# Altium PCB Big Coil Bridge PCBA_2.PcbDoc
Units mm, origin at the board's own origin, x right, y up, seen from the top; angles counter-clockwise.
Board outline 134 x 286 mm, 2 copper layers (Top Layer, Bottom Layer); 22 components, 6 nets, 674 pads, 192 vias.
Unrouted connection lines stored in the file: 1.
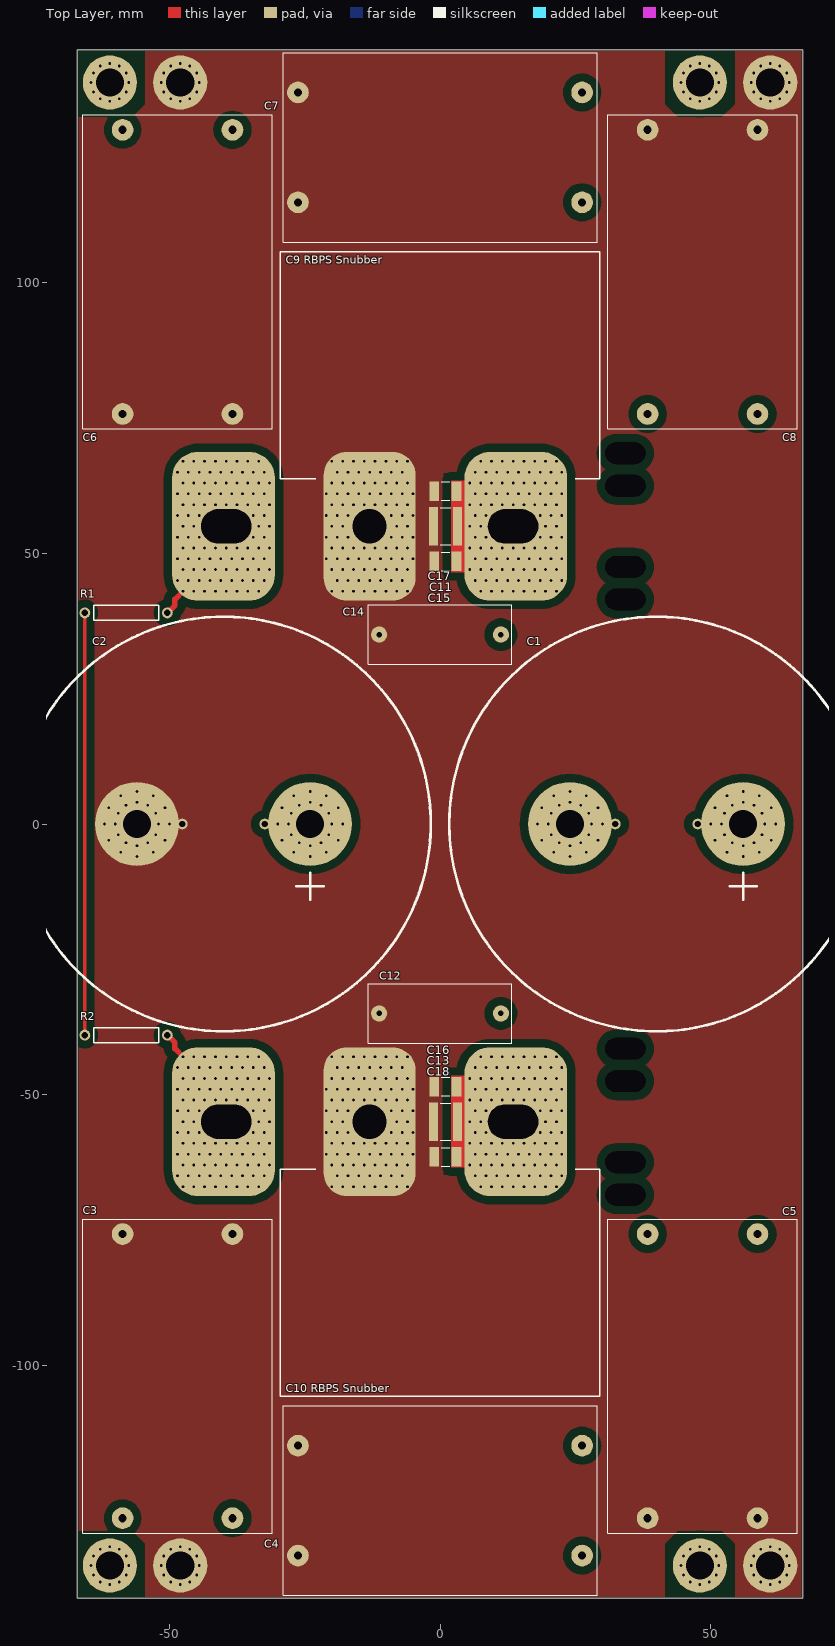
[diagram p0: Top Layer view]
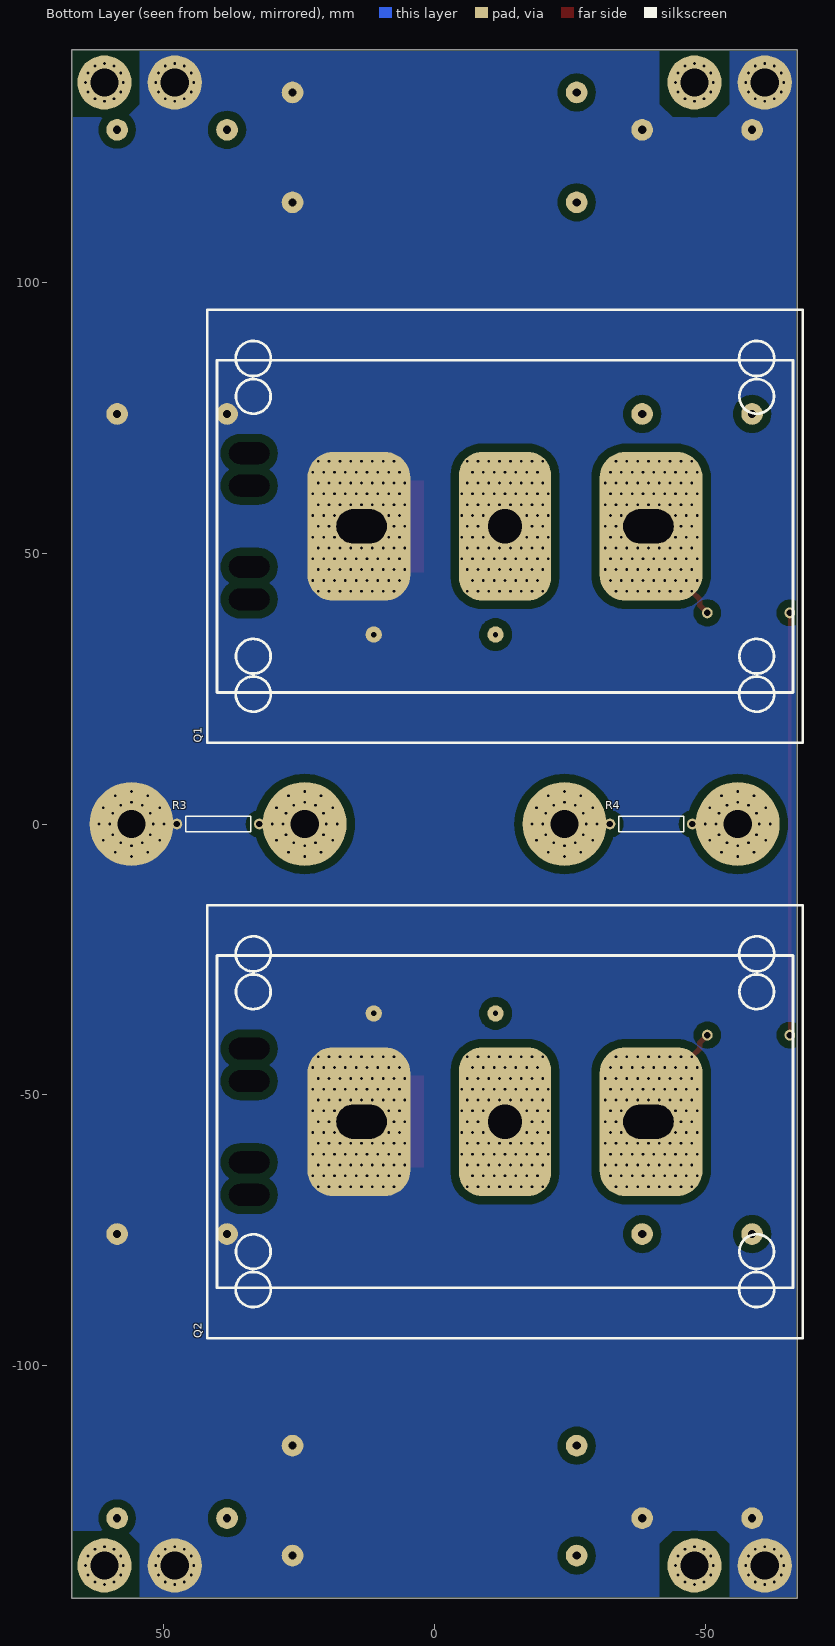
[diagram p1: Bottom Layer view, seen from below]
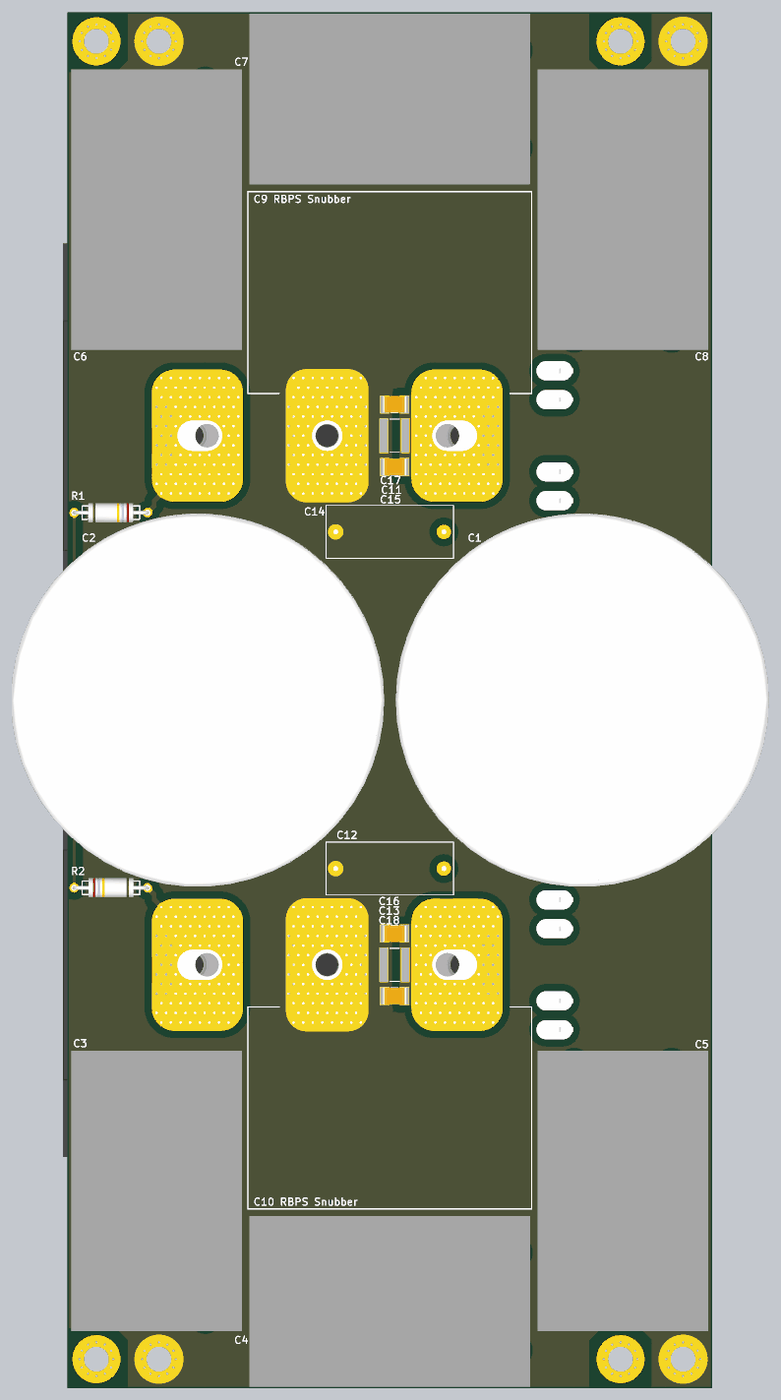
[diagram p2: 3D render of the assembled board from above, using the file's embedded part models]
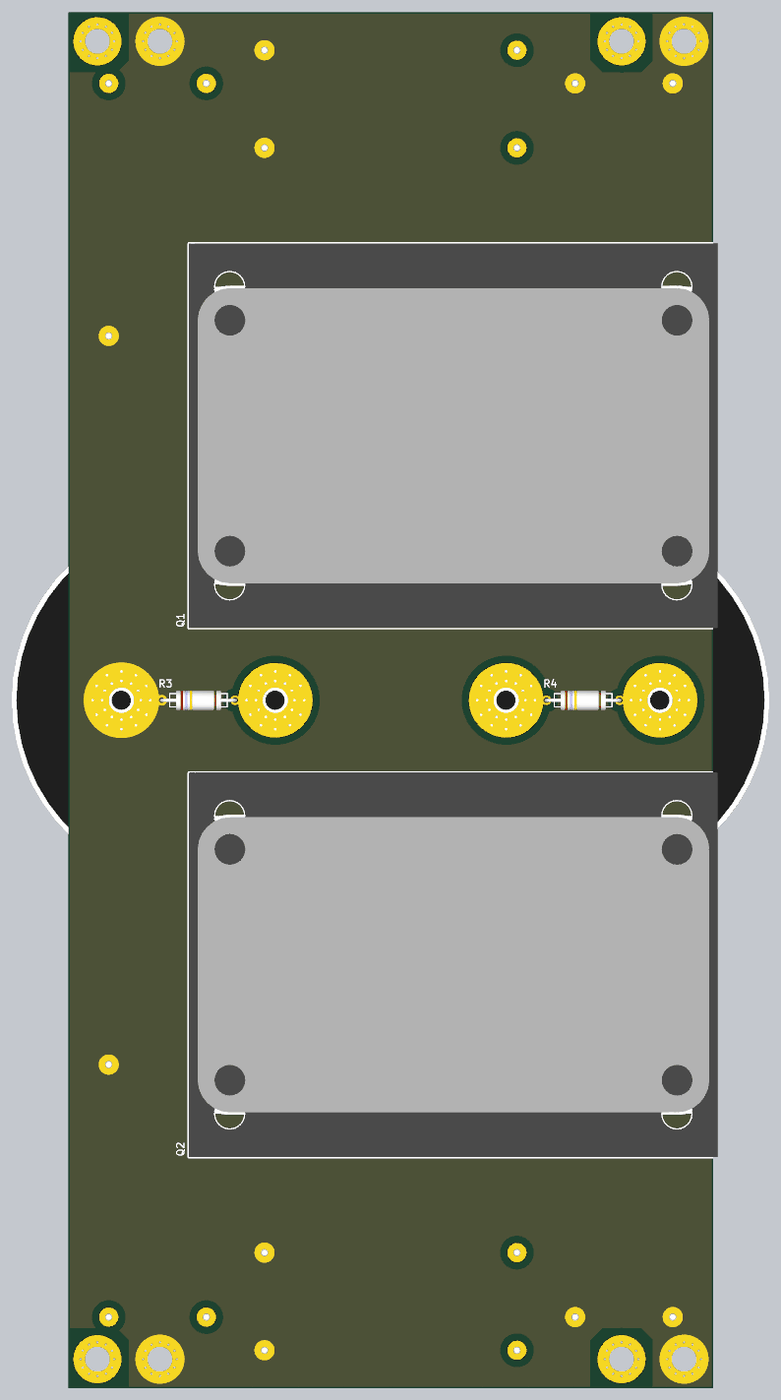
[diagram p3: 3D render of the assembled board from below, using the file's embedded part models]

## Layer stack, top to bottom
Top Solder: solder mask 0.0102, Solder Resist, Dk 3.5
Top Layer: signal copper 0.0356
Dielectric 1: dielectric 0.32, FR-4, Dk 4.8
Bottom Layer: signal copper 0.0356
Bottom Solder: solder mask 0.0102, Solder Resist, Dk 3.5

## Board outline
-67,-143 -67,143 67,143 67,-143

## Design rules (kind name [scope] priority, off if disabled: settings)
BoardOutlineClearance [All] p1: gap=0.25 ignorepadtopadclearanceinfootprint=FALSE
Clearance Clearance_1 [InNet('GND')] p1: gap=1.5 ignorepadtopadclearanceinfootprint=FALSE
Clearance Clearance_2 [InNet('VCC')] p2: gap=1.5 ignorepadtopadclearanceinfootprint=FALSE
Clearance [All] p3: gap=0.254 ignorepadtopadclearanceinfootprint=FALSE except(0: Arc-Hole Track-Hole SMDPad-Hole THPad-Hole Via-Hole Fill-Hole Poly-Hole Region-Hole Text-Hole)
Height [All] p1 off: minheight=0 maxheight=25.4 prefheight=12.7
HoleSize [All] p1: absolutevalues=TRUE maxlimit=10 minlimit=0.025 maxpercent=80.000 minpercent=20.000
PolygonConnect [All] p1: connectstyle=Direct reliefconductorwidth=0.254 reliefentries=4 polygonreliefangle="90 Angle" airgapwidth=0.254
RoutingVias [All] p1: holewidth=0.711 width=1.27 viastyle="Through Hole" minholewidth=0.711 minwidth=1.27 maxholewidth=0.711 maxwidth=1.27
SolderMaskExpansion [All] p1: expansion=0.102
Width [All] p1: maxlimit=100 minlimit=0.254 preferedwidth=1 minimp=50.000000 maximp=50.000000 favimp=50.000000
28 further rules are at their usual default settings.

## Components (designator, comment, footprint, x,y, rotation, side; value= is the part's Value field where it differs from the comment)
C1 "885012209028" PEH200YV447BMB2 40,0 r180 top locked value=4700u
C2 "885012209028" PEH200YV447BMB2 -40,0 r180 top locked value=4700u
C3 "" C4AEOBW5400A3NJ -48.5,-102 r90 top locked
C4 "" C4AEOBW5400A3NJ 0,-125 r180 top locked
C5 "" C4AEOBW5400A3NJ 48.5,-102 r270 top locked
C6 "" C4AEOBW5400A3NJ -48.5,102 r270 top locked
C7 "" C4AEOBW5400A3NJ 0,125 r180 top locked
C8 "" C4AEOBW5400A3NJ 48.5,102 r90 top locked
C11 "Capacitor" 1825C 1,55 r180 top
C12 "Capacitor" B32653A0224 0,-35 r180 top locked
C13 "Capacitor" 1825C 1,-55 r180 top
C14 "Capacitor" B32653A0224 0,35 r180 top locked
C15 "Capacitor" 1812C 1,48.5 r180 top
C16 "Capacitor" 1812C 1,-48.5 r180 top
C17 "Capacitor" 1812C 1,61.5 r180 top
C18 "Capacitor" 1812C 1,-61.5 r180 top
Q1 "DUAL_IGBT_BRICK" CM300/SKM200_DUAL_FOOTPRINT_2 -13,55 r0 bottom locked
Q2 "DUAL_IGBT_BRICK" CM300/SKM200_DUAL_FOOTPRINT_2 -13,-55 r0 bottom locked
R1 "Resistor" Res_Axial_0.6in -58,39 r0 top locked
R2 "Resistor" Res_Axial_0.6in -58,-39 r180 top locked
R3 "Resistor" Res_Axial_0.6in 40,0 r0 bottom locked
R4 "Resistor" Res_Axial_0.6in -40,0 r0 bottom locked

## Footprints (in the part's own frame and the unit in brackets; to place one, negate y for a bottom-side part, rotate by r counter-clockwise, add the part's x,y. Pads: shape width x height; smd on the part's side, far side on the other; paste and mask are expansions set on the pad)
1812C [mm] "Chip Capacitor, 2-Leads, Body 4.50x3.20mm, IPC Low Density"
  rect 1.8x3.6 smd: 1(-2.05,0) 2(2.05,0)
  silkscreen extent -0.75,-1.7 0.75,1.7, body extent -2.4,-1.75 2.4,1.75, height 2
1825C [mm] "Chip Capacitor, 2-Leads, 1825, Body 4.57x6.35mm, IPC Medium Density"
  rect 1.65x7.1 smd: 1(-2.225,0) 2(2.225,0)
  silkscreen extent -1,-3.45 1,3.45, body extent -2.16,-3.05 2.16,3.05, height 3.56
B32653A0224 [mm] "220nF 1kV PP"
  round 3 hole 1: 1(-11.25,0) 2(11.25,0)
  silkscreen extent -13.25,-5.5 13.25,5.5, body extent -13.25,-5.5 13.25,5.5, height 20.5
C4AEOBW5400A3NJ [mm] "C4AE, Film, Metallized Polypropylene, DC Link, 40 uF, 5%, 900 VDC, 70C, Lead Spacing = 52.5mm"
  round 4 hole 1.5: 1(-26.25,-10.15) 1(-26.25,10.15) 2(26.25,-10.15) 2(26.25,10.15)
  silkscreen extent -29,-17.5 29,17.5, body extent -29.15,-17.75 29.15,17.75, height 50.31
CM300/SKM200_DUAL_FOOTPRINT_2 [mm] "1200V Half Bridge IGBT Module"
  round 1 hole 0.5: C1(18.5,-8) C1(18.5,-4) C1(18.5,0) C1(18.5,4) C1(18.5,8) C1(19.5,-10) C1(19.5,-6) C1(19.5,-2) C1(19.5,2) C1(19.5,6) C1(19.5,10) C1(20.5,-12) C1(20.5,-8) C1(20.5,-4) C1(20.5,0) C1(20.5,4) C1(20.5,8) C1(20.5,12) C1(21.5,-10) C1(21.5,-6) C1(21.5,-2) C1(21.5,2) C1(21.5,6) C1(21.5,10) C1(22.5,-12) C1(22.5,-8) C1(22.5,-4) C1(22.5,4) C1(22.5,8) C1(22.5,12) C1(23.5,-10) C1(23.5,-6) C1(23.5,6) C1(23.5,10) C1(24.5,-12) C1(24.5,-8) C1(24.5,-4) C1(24.5,4) C1(24.5,8) C1(24.5,12) C1(25.5,-10) C1(25.5,-6) C1(25.5,6) C1(25.5,10) C1(26.5,-12) C1(26.5,-8) C1(26.5,-4) C1(26.5,4) C1(26.5,8) C1(26.5,12) C1(27.5,-10) C1(27.5,-6) C1(27.5,6) C1(27.5,10) C1(28.5,-12) C1(28.5,-8) C1(28.5,-4) C1(28.5,4) C1(28.5,8) C1(28.5,12) C1(29.5,-10) C1(29.5,-6) C1(29.5,6) C1(29.5,10) C1(30.5,-12) C1(30.5,-8) C1(30.5,-4) C1(30.5,4) C1(30.5,8) C1(30.5,12) C1(31.5,-10) C1(31.5,-6) C1(31.5,-2) C1(31.5,2) C1(31.5,6) C1(31.5,10) C1(32.5,-12) C1(32.5,-8) C1(32.5,-4) C1(32.5,0) C1(32.5,4) C1(32.5,8) C1(32.5,12) C1(33.5,-10) C1(33.5,-6) C1(33.5,-2) C1(33.5,2) C1(33.5,6) C1(33.5,10) C1(34.5,-12) C1(34.5,-8) C1(34.5,-4) C1(34.5,0) C1(34.5,4) C1(34.5,8) C1(34.5,12) C1(35.5,-10) C1(35.5,-6) C1(35.5,-2) C1(35.5,2) C1(35.5,6) C1(35.5,10) C2E1(-35.5,-10) C2E1(-35.5,-6) C2E1(-35.5,-2) C2E1(-35.5,2) C2E1(-35.5,6) C2E1(-35.5,10) C2E1(-34.5,-12) C2E1(-34.5,-8) C2E1(-34.5,-4) C2E1(-34.5,0) C2E1(-34.5,4) C2E1(-34.5,8) C2E1(-34.5,12) C2E1(-33.5,-10) C2E1(-33.5,-6) C2E1(-33.5,-2) C2E1(-33.5,2) C2E1(-33.5,6) C2E1(-33.5,10) C2E1(-32.5,-12) C2E1(-32.5,-8) C2E1(-32.5,-4) C2E1(-32.5,0) C2E1(-32.5,4) C2E1(-32.5,8) C2E1(-32.5,12) C2E1(-31.5,-10) C2E1(-31.5,-6) C2E1(-31.5,-2) C2E1(-31.5,2) C2E1(-31.5,6) C2E1(-31.5,10) C2E1(-30.5,-12) C2E1(-30.5,-8) C2E1(-30.5,-4) C2E1(-30.5,4) C2E1(-30.5,8) C2E1(-30.5,12) C2E1(-29.5,-10) C2E1(-29.5,-6) C2E1(-29.5,6) C2E1(-29.5,10) C2E1(-28.5,-12) C2E1(-28.5,-8) C2E1(-28.5,-4) C2E1(-28.5,4) C2E1(-28.5,8) C2E1(-28.5,12) C2E1(-27.5,-10) C2E1(-27.5,-6) C2E1(-27.5,6) C2E1(-27.5,10) C2E1(-26.5,-12) C2E1(-26.5,-8) C2E1(-26.5,-4) C2E1(-26.5,4) C2E1(-26.5,8) C2E1(-26.5,12) C2E1(-25.5,-10) C2E1(-25.5,-6) C2E1(-25.5,6) C2E1(-25.5,10) C2E1(-24.5,-12) C2E1(-24.5,-8) C2E1(-24.5,-4) C2E1(-24.5,4) C2E1(-24.5,8) C2E1(-24.5,12) C2E1(-23.5,-10) C2E1(-23.5,-6) C2E1(-23.5,6) C2E1(-23.5,10) C2E1(-22.5,-12) C2E1(-22.5,-8) C2E1(-22.5,-4) C2E1(-22.5,4) C2E1(-22.5,8) C2E1(-22.5,12) C2E1(-21.5,-10) C2E1(-21.5,-6) C2E1(-21.5,-2) C2E1(-21.5,2) C2E1(-21.5,6) C2E1(-21.5,10) C2E1(-20.5,-12) C2E1(-20.5,-8) C2E1(-20.5,-4) C2E1(-20.5,0) C2E1(-20.5,4) C2E1(-20.5,8) C2E1(-20.5,12) C2E1(-19.5,-10) C2E1(-19.5,-6) C2E1(-19.5,-2) C2E1(-19.5,2) C2E1(-19.5,6) C2E1(-19.5,10) C2E1(-18.5,-8) C2E1(-18.5,-4) C2E1(-18.5,0) C2E1(-18.5,4) C2E1(-18.5,8) E2(-8,-6) E2(-8,-2) E2(-8,2) E2(-8,6) E2(-7,-12) E2(-7,-8) E2(-7,-4) E2(-7,0) E2(-7,4) E2(-7,8) E2(-7,12) E2(-6,-10) E2(-6,-6) E2(-6,-2) E2(-6,2) E2(-6,6) E2(-6,10) E2(-5,-12) E2(-5,-8) E2(-5,-4) E2(-5,0) E2(-5,4) E2(-5,8) E2(-5,12) E2(-4,-10) E2(-4,-6) E2(-4,-2) E2(-4,2) E2(-4,6) E2(-4,10) E2(-3,-12) E2(-3,-8) E2(-3,-4) E2(-3,4) E2(-3,8) E2(-3,12) E2(-2,-10) E2(-2,-6) E2(-2,6) E2(-2,10) E2(-1,-12) E2(-1,-8) E2(-1,-4) E2(-1,4) E2(-1,8) E2(-1,12) E2(0,-10) E2(0,-6) E2(0,6) E2(0,10) E2(1,-12) E2(1,-8) E2(1,-4) E2(1,4) E2(1,8) E2(1,12) E2(2,-10) E2(2,-6) E2(2,6) E2(2,10) E2(3,-12) E2(3,-8) E2(3,-4) E2(3,4) E2(3,8) E2(3,12) E2(4,-10) E2(4,-6) E2(4,-2) E2(4,2) E2(4,6) E2(4,10) E2(5,-12) E2(5,-8) E2(5,-4) E2(5,0) E2(5,4) E2(5,8) E2(5,12) E2(6,-10) E2(6,-6) E2(6,-2) E2(6,2) E2(6,6) E2(6,10) E2(7,-12) E2(7,-8) E2(7,-4) E2(7,0) E2(7,4) E2(7,8) E2(7,12) E2(8,-6) E2(8,-2) E2(8,2) E2(8,6)
  rrect50% 19x27.5 hole 6.3 slot 9.3 at 0 deg copper offset 0.5,0: C1(26.5,0)
  rrect50% 19x27.5 hole 6.3 slot 9.3 at 0 deg copper offset -0.5,0: C2E1(-26.5,0)
  round 0 hole 4 slot 7.5 at 0 deg unplated: E1_K(47.25,7.5) E2_K(47.25,-7.5) G1(47.25,13.5) G2(47.25,-13.5)
  rrect50% 17x27.5 hole 6.3: E2(0,0)
  silkscreen extent -55,-40 55,40, body extent -55,-40 55,40, height 30.51
PEH200YV447BMB2 [mm] "RIFA Electrolytic Capacitor"
  round 15.5 hole 5.2: 1(-16,0) 2(16,0)
  silkscreen extent -38.3,-38.3 38.3,38.3, body extent -38.85,-38.8 38.75,38.8, height 170.01
Res_Axial_0.6in [mm] "Axial resistor 0.6\" pitch"
  round 2 hole 1.2: 1(-7.62,0) 2(7.62,0)
  silkscreen extent -6,-1.4 6,1.4, body extent -8.02,-2 8.02,2, height 5

## Part data
C1 C2: library part Capacitor_Elec, "Electrolytic capacitor", voltage=450V, ComponentLink1Description=Manufacturer, ComponentLink1URL=http://www.we-online.de, ComponentLink2Description=Datasheet, ComponentLink2URL=http://katalog.we-online.com/pbs/datasheet/861101487033.pdf
C3 C4 C5 C6 C7 C8: library part Capacitor, Capacitance=40u, voltage=900V
C11 C13: Capacitance=47n, package=1825, voltage=1kV
C12 C14: Capacitance=220n, voltage=1kV
C15 C16: Capacitance=0.1u, package=1812, voltage=1kV
C17 C18: Capacitance=22n, package=1812, voltage=1kV
Q1 Q2: "IGBT, DUAL, BRICK"
R1 R2: Parameter 1=10k
R3 R4: Parameter 1=100k

## Free pads (board coordinates)
  round 10 hole 5.2: 0(-61,137) 0(-61,-137) 0(-48,137) 0(-48,-137) 0(48,-137) 0(48,137) 0(61,-137) 0(61,137)

## Via types
v1: diameter 1, hole 0.5, Top Layer to Bottom Layer, 192 vias

## Nets (pads, with @x,y where several pads share a name; then routed paths per layer and width w, separated by ;. In a path a pad name is that pad's centre, name@x,y a point inside that pad or via, vN(x,y) a via of type N, cw(c..) or ccw(c..) an arc to the next point about the centre after c; other vN are vias at no path point)
GND: C2.2 C3.2 C4.2 C5.2 C6.2 C7.2 C8.2 C11.2 C12.2 C13.2 C14.2 C15.2 C16.2 C17.2 C18.2 pad.0@61,137 pad.0@61,-137 pad.0@-48,137 pad.0@-48,-137 Q1.E2 Q2.E2 R4.1
  other v1: -48,-140.5 61,-140.5 -49.75,-140.031 -46.25,-140.031 59.25,-140.031 62.75,-140.031 -51.031,-138.75 -44.969,-138.75 57.969,-138.75 64.031,-138.75 -51.5,-137 -44.5,-137 57.5,-137 64.5,-137 -51.031,-135.25 -44.969,-135.25 57.969,-135.25 64.031,-135.25 -49.75,-133.969 -46.25,-133.969 59.25,-133.969 62.75,-133.969 -48,-133.5 61,-133.5 -56,-6 -59,-5.196 -53,-5.196 -56,-4 -58,-3.464 -54,-3.464 -61.196,-3 -50.804,-3 -59.464,-2 -52.536,-2 -62,0 -60,0 -52,0 -50,0 -59.464,2 -52.536,2 -61.196,3 -50.804,3 -58,3.464 -54,3.464 -56,4 -59,5.196 -53,5.196 -56,6 -48,133.5 61,133.5 -49.75,133.969 -46.25,133.969 59.25,133.969 62.75,133.969 -51.031,135.25 -44.969,135.25 57.969,135.25 64.031,135.25 -51.5,137 -44.5,137 57.5,137 64.5,137 -51.031,138.75 -44.969,138.75 57.969,138.75 64.031,138.75 -49.75,140.031 -46.25,140.031 59.25,140.031 62.75,140.031 -48,140.5 61,140.5
NetC1_2: C1.2 C2.1 R3.1 R4.2
  other v1: -24,-6 24,-6 -27,-5.196 -21,-5.196 21,-5.196 27,-5.196 -24,-4 24,-4 -26,-3.464 -22,-3.464 22,-3.464 26,-3.464 -29.196,-3 -18.804,-3 18.804,-3 29.196,-3 -27.464,-2 -20.536,-2 20.536,-2 27.464,-2 -30,0 -28,0 -20,0 -18,0 18,0 20,0 28,0 30,0 -27.464,2 -20.536,2 20.536,2 27.464,2 -29.196,3 -18.804,3 18.804,3 29.196,3 -26,3.464 -22,3.464 22,3.464 26,3.464 -24,4 24,4 -27,5.196 -21,5.196 21,5.196 27,5.196 -24,6 24,6
NetQ1_C2E1: Q1.C2E1 R1.2 | length 5.2
  Top Layer w1: R1.2 -49,40.38 -49,41.5 Q1.C2E1@-47.5,43
NetQ2_C2E1: Q2.C2E1 R2.1 | length 5.2
  Top Layer w1: R2.1 -49,-40.38 -49,-41.5 Q2.C2E1@-47.5,-43
NetR1_1: R1.1 R2.2 | length 78
  Top Layer w0.675: R2.2 R1.1
VCC: C1.1 C3.1 C4.1 C5.1 C6.1 C7.1 C8.1 C11.1 C12.1 C13.1 C14.1 C15.1 C16.1 C17.1 C18.1 pad.0@48,137 pad.0@48,-137 pad.0@-61,137 pad.0@-61,-137 Q1.C1 Q2.C1 R3.2
  other v1: -61,-140.5 48,-140.5 -62.75,-140.031 -59.25,-140.031 46.25,-140.031 49.75,-140.031 -64.031,-138.75 -57.969,-138.75 44.969,-138.75 51.031,-138.75 -64.5,-137 -57.5,-137 44.5,-137 51.5,-137 -64.031,-135.25 -57.969,-135.25 44.969,-135.25 51.031,-135.25 -62.75,-133.969 -59.25,-133.969 46.25,-133.969 49.75,-133.969 -61,-133.5 48,-133.5 56,-6 53,-5.196 59,-5.196 56,-4 54,-3.464 58,-3.464 50.804,-3 61.196,-3 52.536,-2 59.464,-2 50,0 52,0 60,0 62,0 52.536,2 59.464,2 50.804,3 61.196,3 54,3.464 58,3.464 56,4 53,5.196 59,5.196 56,6 -61,133.5 48,133.5 -62.75,133.969 -59.25,133.969 46.25,133.969 49.75,133.969 -64.031,135.25 -57.969,135.25 44.969,135.25 51.031,135.25 -64.5,137 -57.5,137 44.5,137 51.5,137 -64.031,138.75 -57.969,138.75 44.969,138.75 51.031,138.75 -62.75,140.031 -59.25,140.031 46.25,140.031 49.75,140.031 -61,140.5 48,140.5
pads on no net: Q1.E1_K Q1.E2_K Q1.G1 Q1.G2 Q2.E1_K Q2.E2_K Q2.G1 Q2.G2

## Polygon pours and split planes (outlines as drawn)
VCC on Bottom Layer "Bottom Layer-VCC" (solid, remove dead copper, pour order 2): -67,-143 67,-143 67,143 -67,143
GND on Top Layer "Bottom Layer-GND" (solid, remove dead copper, pour order 0): -67,-143 67,-143 67,143 -67,143

## Other copper
Top Layer:
  rectangle net VCC: 2,46.5 5,63.5
  rectangle net VCC: 2,-63.5 5,-46.5
  pour cut-out: 41.49,-143 41.49,-133 43.959,-130.531 52.041,-130.531 54.51,-133 54.51,-143
  pour cut-out: 41.49,143 41.49,133 43.959,130.531 52.041,130.531 54.51,133 54.51,143
  pour cut-out: -67,143 -67,130.531 -56.959,130.531 -54.49,133 -54.49,143
  pour cut-out: -67,-143 -67,-130.531 -56.959,-130.531 -54.49,-133 -54.49,-143
Bottom Layer:
  pour cut-out: -41.49,143 -41.49,133 -43.959,130.531 -52.041,130.531 -54.51,133 -54.51,143
  pour cut-out: -41.49,-143 -41.49,-133 -43.959,-130.531 -52.041,-130.531 -54.51,-133 -54.51,-143
  pour cut-out: 67,-143 67,-130.531 56.959,-130.531 54.49,-133 54.49,-143
  pour cut-out: 67,143 67,130.531 56.959,130.531 54.49,133 54.49,143

## Silkscreen, mask and mechanical layers (free items; w line width, h text height)
Top Overlay:
  lines w0.25: -23,-63.75 -29.5,-63.75 -29.5,-105.75 29.5,-105.75 29.5,-63.75 25,-63.75 ; -23,63.75 -29.5,63.75 -29.5,105.75 29.5,105.75 29.5,63.75 25,63.75
  text "C9 RBPS Snubber" at -28.5,103.5 h1.5
  text "C10 RBPS Snubber" at -28.5,-105 h1.5
Board Outline:
  the board outline again, w0.5